# Altium PCB MSXIV_BatteryModuleConnectorBoard_Rev2.PcbDoc
Units mm, origin at the board's own origin, x right, y up, seen from the top; angles counter-clockwise.
Board outline 46.74 x 46.4 mm, 2 copper layers (Top Layer, Bottom Layer); 15 components, 16 nets, 54 pads, 0 vias.
Unrouted connection lines stored in the file: 11.
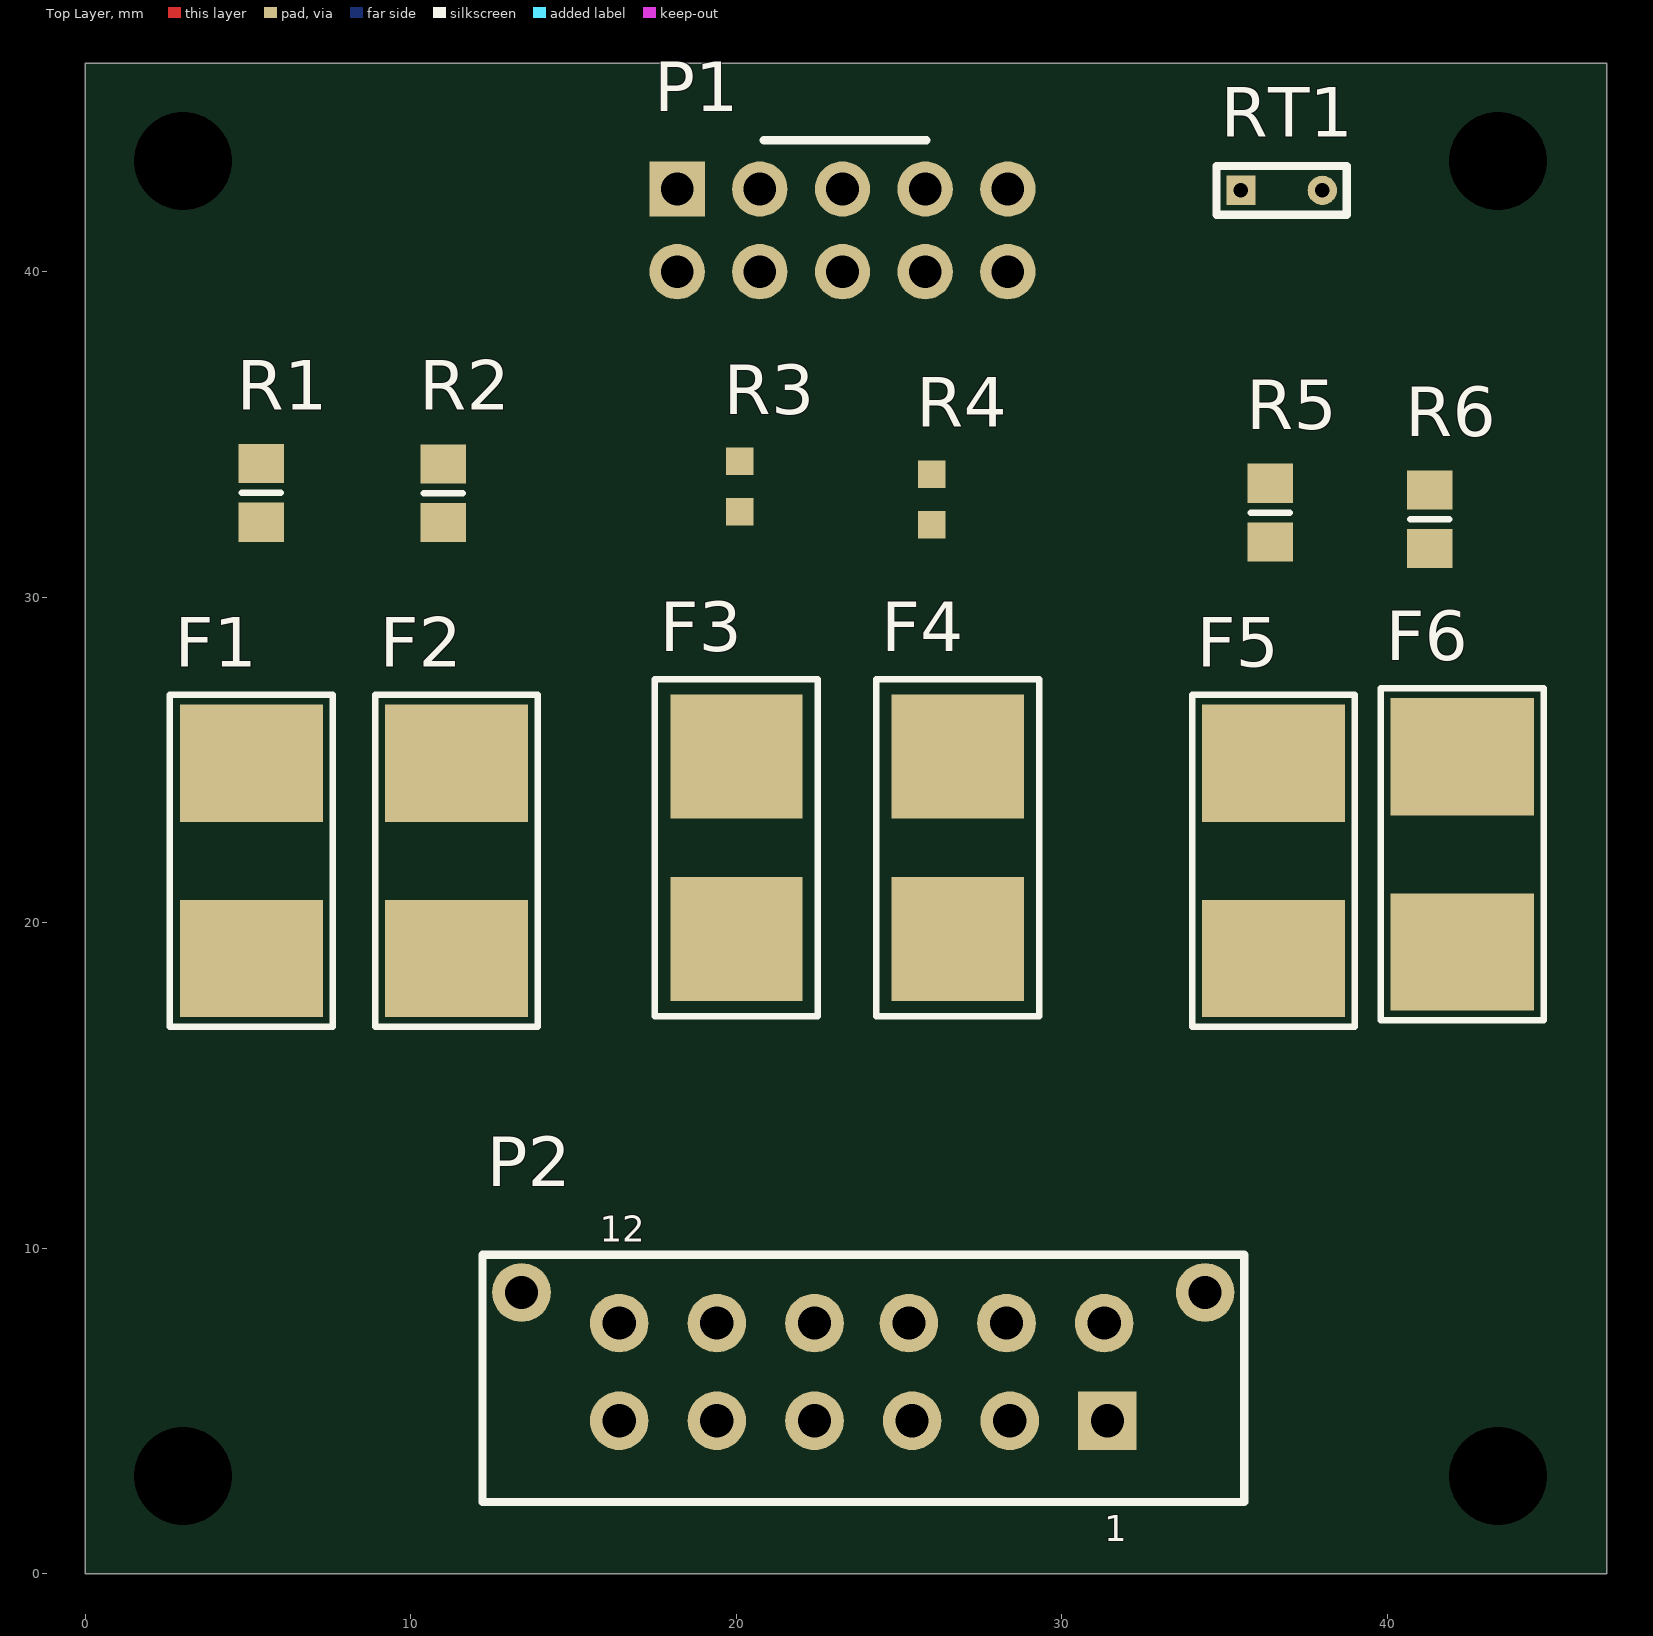
[diagram p0: Top Layer view]
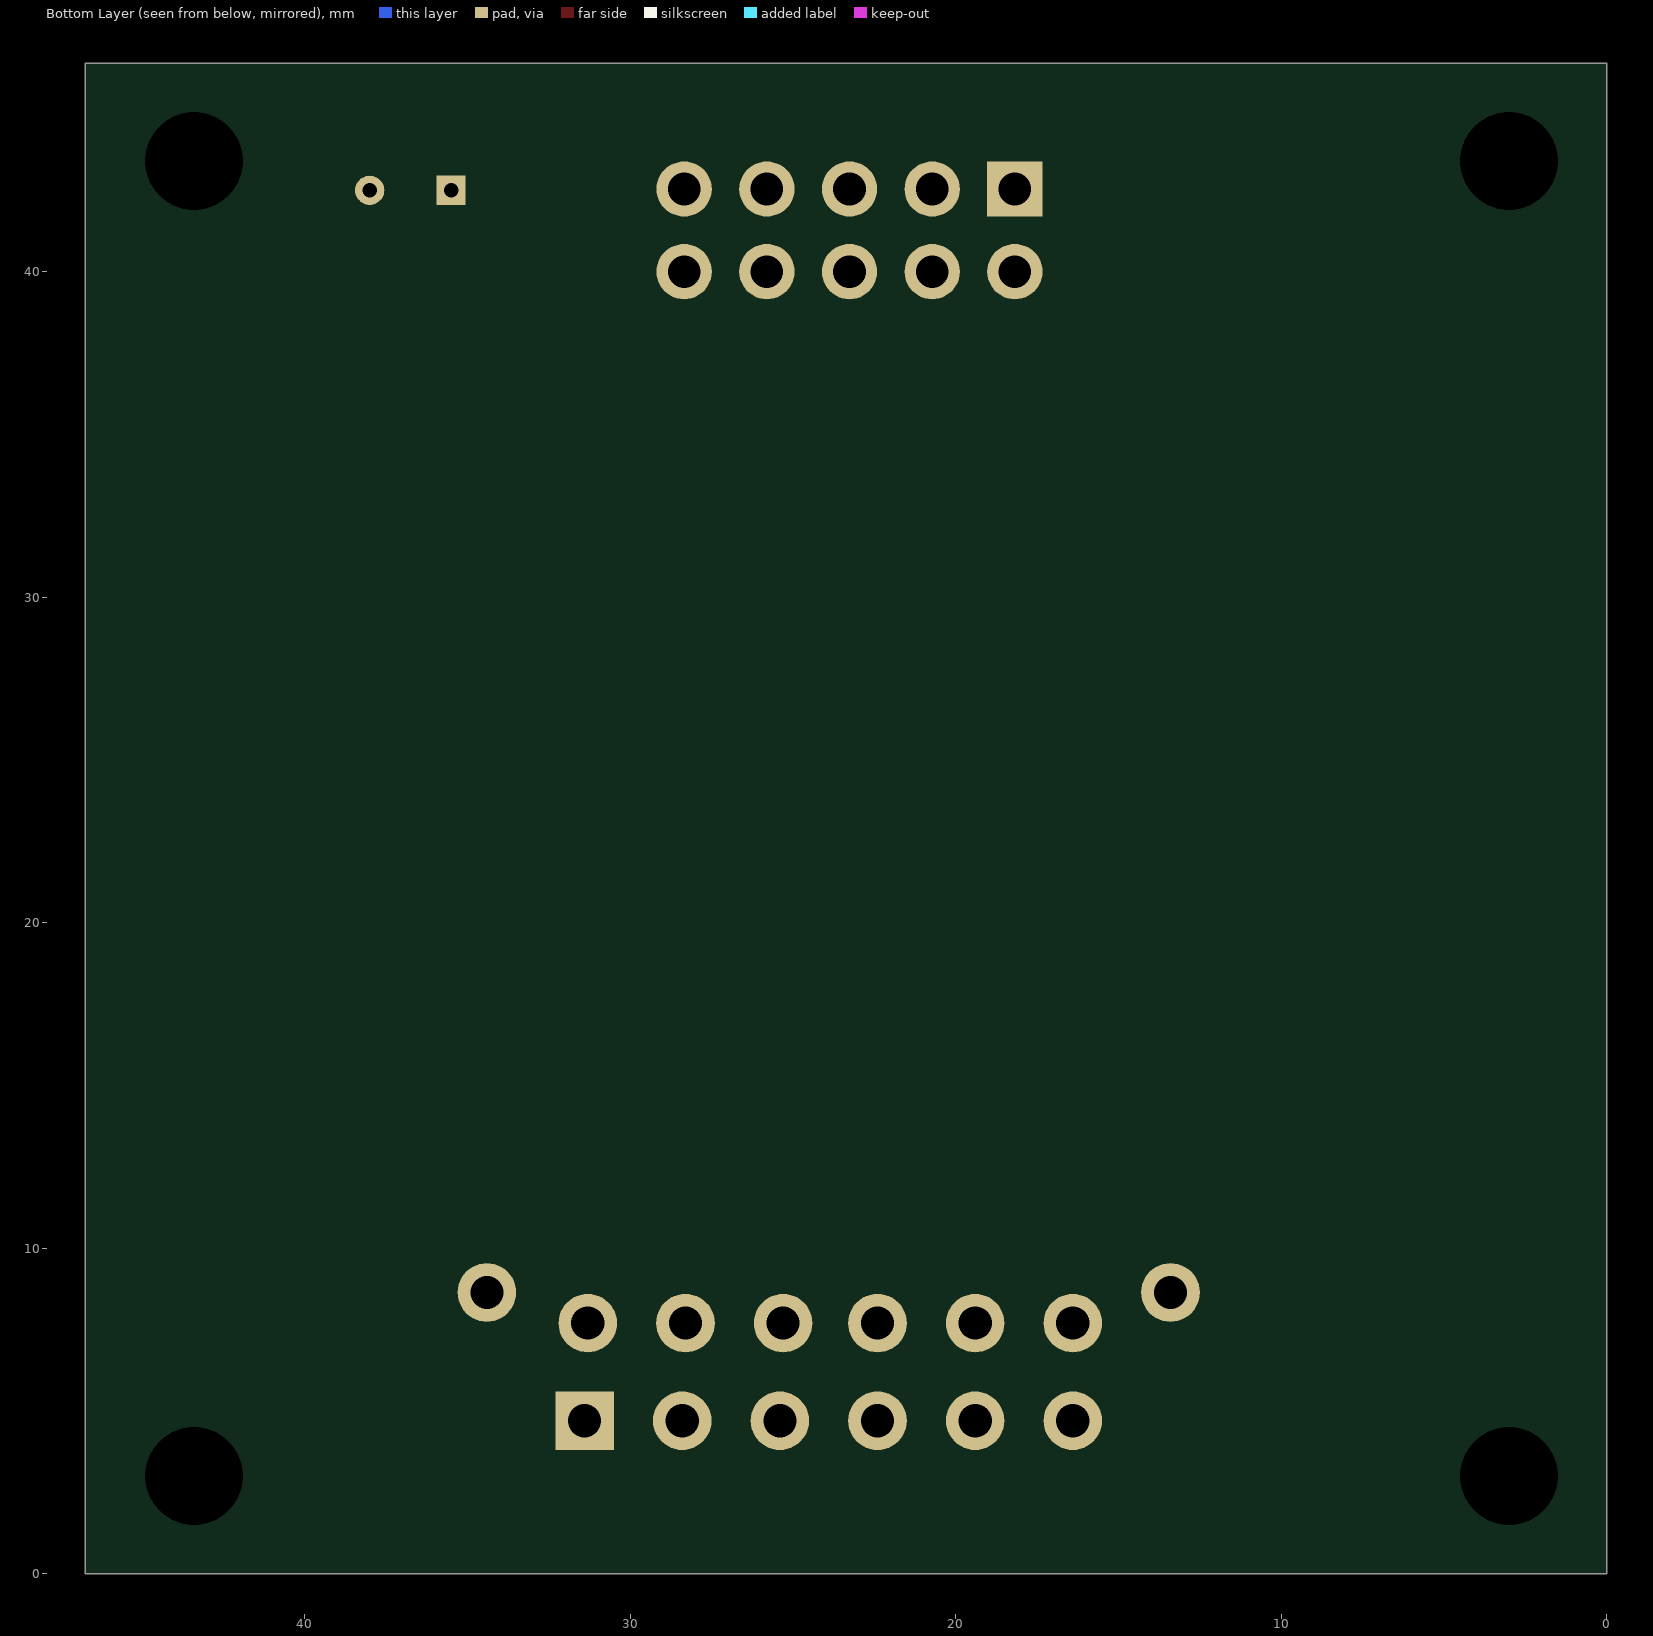
[diagram p1: Bottom Layer view, seen from below]

## Layer stack, top to bottom
Top Solder: solder mask 0.0102, Solder Resist, Dk 3.5
Top Layer: signal copper 0.0356
Dielectric 1: dielectric 0.32, FR-4, Dk 4.8
Bottom Layer: signal copper 0.0356
Bottom Solder: solder mask 0.0102, Solder Resist, Dk 3.5

## Board outline
0,0 46.736,0 46.736,46.4 0,46.4

## Design rules (kind name [scope] priority, off if disabled: settings)
Clearance [All] p1: gap=0.254 ignorepadtopadclearanceinfootprint=FALSE except(0: Arc-Hole Track-Hole SMDPad-Hole THPad-Hole Via-Hole Fill-Hole Poly-Hole Region-Hole Text-Hole)
PolygonConnect [All] p1: connectstyle=Relief reliefconductorwidth=0.254 reliefentries=4 polygonreliefangle="90 Angle" airgapwidth=0.254
RoutingVias [All] p1: holewidth=0.711 width=1.27 viastyle="Through Hole" minholewidth=0.711 minwidth=1.27 maxholewidth=0.711 maxwidth=1.27
SolderMaskExpansion [All] p1: expansion=0.102
Width [All] p1: maxlimit=0.254 minlimit=0.254 preferedwidth=0.254
30 further rules are at their usual default settings.

## Components (designator, comment, footprint, x,y, rotation, side; value= is the part's Value field where it differs from the comment)
F1 "FUSE 250MA 250V" "Fuse IEC 60127-4" 5.1,21.9 r90 top
F2 "FUSE 250MA 250V" "Fuse IEC 60127-4" 11.4,21.9 r90 top
F3 "FUSE 500mA" "Fuse 0678D" 20,22.3 r90 top
F4 "FUSE 500mA" "Fuse 0678D" 26.8,22.3 r90 top
F5 "FUSE 250MA 250V" "Fuse IEC 60127-4" 36.5,21.9 r90 top
F6 "FUSE 250MA 250V" "Fuse IEC 60127-4" 42.3,22.1 r90 top
P1 "CONN 10POS HEADR FMALE 0.1\"" "CONN ,10 POS Header 0.100\"" 28.34,42.54 r180 top
P2 "CONN 12POS MICRO-FIT 3mm" "CONN, 12POS MICRO-FIT 3mm" 31.4,4.7 r0 top
R1 "" 0805 5.4,33.2 r270 top
R2 "" 0805 11,33.2 r90 top
R3 "RES 1 OHM 5% 1/10W 0603" "RES, 0603" 20.1,33.4 r90 top
R4 "RES 1 OHM 5% 1/10W 0603" "RES, 0603" 26,33 r270 top
R5 "" 0805 36.401,32.597 r270 top
R6 "" 0805 41.3,32.4 r90 top
RT1 "10K NTC" "NTC THERMISTOR BEAD" 35.5,42.5 r0 top

## Footprints (in the part's own frame and the unit in brackets; to place one, negate y for a bottom-side part, rotate by r counter-clockwise, add the part's x,y. Pads: shape width x height; smd on the part's side, far side on the other; paste and mask are expansions set on the pad)
0805 [mm]
  rect 1.2x1.4 smd: 1(-0.903,-0.001) 2(0.897,-0.001)
  silkscreen extent 0,-0.6 0,0.6, body extent -1.08,-0.7 1.07,0.7, height 0.7
"CONN ,10 POS Header 0.100\"" [mm]
  rect 1.7x1.7 hole 1: 1(10.16,0)
  round 1.7 hole 1: 2(10.16,2.54) 3(7.62,0) 4(7.62,2.54) 5(5.08,0) 6(5.08,2.54) 7(2.54,0) 8(2.54,2.54) 9(0,0) 10(0,2.54)
  silkscreen extent 2.5,-1.5 7.5,-1.5
"CONN, 12POS MICRO-FIT 3mm" [mm]
  round 1.8 hole 1.02: 0(-18,3.94) 0(3,3.94) 2(-3,0) 3(-6,0) 4(-9,0) 5(-12,0) 6(-15,0) 7(-0.1,3) 8(-3.1,3) 9(-6.1,3) 10(-9,3) 11(-12,3) 12(-15,3)
  rect 1.8x1.8 hole 1.02: 1(0,0)
  silkscreen extent -19.2,-2.5 4.2,5.1, body extent -18.57,-2.5 3.58,6.27, height 9.95
"Fuse 0678D" [mm]
  rect 3.81x4.06 smd: A(-2.8,0) K(2.8,0)
  silkscreen extent -5.18,-2.5 5.18,2.5
"Fuse IEC 60127-4" [mm]
  rect 3.6x4.4 smd: A(-3,0) K(3,0)
  silkscreen extent -5.1,-2.5 5.1,2.5
"NTC THERMISTOR BEAD" [mm] "NTC Thermistor 10k Bead"
  rect 0.9x0.9 hole 0.45: 1(0,0)
  round 0.9 hole 0.45: 2(2.5,0)
  silkscreen extent -0.75,-0.75 3.25,0.75
"RES, 0603" [mm] "Chip Resistor, 2-Leads, Body 1.60x0.80mm, IPC Medium Density"
  rect 0.85x0.85 smd: 1(-0.775,0) 2(0.775,0)
  body extent -0.8,-0.4 0.8,0.4, height 0.55

## Part data
F1 F2 F5 F6: "Surface Mount Fuses OMF 250V 250mA", Supplier Part Number 1=486-3474-1-ND, Supplier 1=Digi-Key
F3 F4: "FUSE SMT 3912 FAST 250V 500MA", Supplier Part Number 1=507-2256-1-ND, Supplier 1=Digi-Key
P1: "10 Position Header Connector 0.100\" (2.54mm) Through Hole, Right Angle Gold", Current Rating=3A, Insulation Color=Black, Manufacturer 1="Sullins Connector Solutions", Manufacturer Part Number 1=SFH11-PBPC-D05-RA-BK, Material Flammability Rating="UL94 V-0", Operating Temperature="-40°C ~ 105°C", Supplier Part Number 1=S9202-ND, Voltage=-, ComponentLink1Description=http://sullinscorp.com/catalogs/147_PAGE119_.100_SFH11_SERIES_FEMALE_HDR_ST_RA.pdf, ComponentLink1URL=http://sullinscorp.com/catalogs/147_PAGE119_.100_SFH11_SERIES_FEMALE_HDR_ST_RA.pdf, Connector Type=Header, Contact Finish - Mating=Gold, Contact Finish - Post=Gold, Contact Finish Thickness - Mating=Flash, Contact Finish Thickness - Post=Flash, Contact Length - Post="0.106\" (2.69mm)", Contact Material=Brass, Contact Shape=Square, Contact Type="Female Socket", Fastening Type=Push-Pull, Ingress Protection=-, Insulation Height="0.236\" (6.00mm)", Insulation Material="Polybutylene Terephthalate (PBT)", Mated Stacking Heights=-, Mounting Type="Through Hole, Right Angle", Number of Positions=10, Number of Positions Loaded=All, Number of Rows=2, Packaging=Tray, Part Status=Active, Pitch - Mating="0.100\" (2.54mm)", Row Spacing - Mating="0.100\" (2.54mm)", Style="Board to Board", Supplier 1=Digi-Key, Termination=Solder
P2: "Connector Header Through Hole 12 position 0.118\" (3.00mm)", Current Rating=-, Insulation Color=Black, Manufacturer="Molex, LLC", Manufacturer Part Number=0430451227, Material Flammability Rating="UL94 V-0", Supplier Part Number 1=WM10697-ND, Applications="General Purpose, Medical, Military, Telecommunications", Category="Connectors, Interconnects", ComponentLink1Description=https://www.molex.com/pdm_docs/sd/430451227_sd.pdf, ComponentLink1URL=https://www.molex.com/pdm_docs/sd/430451227_sd.pdf, Connector Type=Header, Contact Finish - Mating=Tin, Contact Finish - Post=Tin, Contact Finish Thickness - Mating="60.0µin (1.52µm)", Contact Finish Thickness - Post=-, Contact Length - Mating=-, Contact Length - Post="0.125\" (3.18mm)", Contact Material=Brass, Contact Shape=Square, Contact Type="Male Pin", Fastening Type="Locking Ramp", Features="Board Guide", Ingress Protection=-, Insulation Height="0.390\" (9.91mm)", Insulation Material="Liquid Crystal Polymer (LCP), Glass Filled", Mated Stacking Heights=-, Mounting Type="Through Hole", Number of Positions=12, Number of Positions Loaded=All, Number of Rows=2, Operating Temperature=-, Overall Contact Length=-, Packaging=Tray, Part Status=Active, Pitch - Mating="0.118\" (3.00mm)", Pricing 1="1=3.61, 10=3.283, 25=3.0816, 50=2.9478, 100=2.8138, 250=2.5458, 500=2.34482, 1008=2.00985, 3024=1.87586 (CAD)", RoHS="RoHS Compliant", Row Spacing - Mating="0.118\" (3.00mm)", Shrouding="Shrouded - 4 Wall", Stock 1=1709, Style="Board to Cable/Wire", Supplier 1=Digi-Key, Termination=Solder, Voltage Rating=-
R1 R2 R5 R6: library part "RES 2 OHM 1% 1/8W 0805", "2 Ohm ±1% 0.125W Chip Resistor 0805", Package="2012 Rohm Semiconductor", Digi-Key_Part_Number=311-2.00CRCT-ND, Digi-Key_Purchase_URL=https://www.digikey.ca/product-detail/en/yageo/RC0805FR-072RL/311-2.00CRCT-ND/730610?utm_source=snapeda&utm_medium=aggregator&utm_campaign=symbol, MF=Yageo, MP=RC0805FR-072RL, SnapEDA_Link=https://www.snapeda.com/parts/RC0805FR-072RL/Yageo/view-part/?ref=snap, Supplier 1=Digi-Key
R3 R4: "RES SMD 1 OHM 5% 1/10W 0603", Digi-Key Part Number=RHM1.0AZCT-ND, Manufacturer 1="Rohm Semiconductor", Manufacturer Part Number 1=KTR03EZPJ1R0, Package / Case="0603 (1608 Metric)", Power (Watts)="0.1W, 1/10W", Resistance="1 Ohms", Supplier Device Package=0603, Tolerance=±5%, Detailed Description ="1 Ohms ±5% 0.1W, 1/10W Chip Resistor 0603 (1608 Metric) Automotive AEC-Q200, High Voltage Thick Film", Supplier 1=Digi-Key, Supplier Part Number 1=RHM1.0AZCT-ND
RT1: library part "NTC THERMISTOR 10K 1% BEAD", "NTC Thermistor 10k Bead", B Value Tolerance=±1%, Manufacturer="Murata Electronics North America", Manufacturer Part Number=NXRT15XH103FA1B030, Operating Temperature="-40°C ~ 125°C", Package / Case=Bead, Resistance in Ohms @ 25°C=10k, Supplier Part Number 1=490-8601-ND, B0/50=-, B25/50=3380K, B25/75=-, B25/85=3434K, B25/100=3455K, Category="Sensors, Transducers", ComponentLink1Description=https://www.murata.com/~/media/webrenewal/support/library/catalog/products/thermistor/ntc/r44e.ashx, ComponentLink1URL=https://www.murata.com/~/media/webrenewal/support/library/catalog/products/thermistor/ntc/r44e.ashx, Length - Lead Wire=-, Mounting Type="Through Hole", Packaging=Bulk, Part Status=Active, Pricing 1="1=0.96, 5=0.91, 10=0.792, 25=0.696, 50=0.5784, 100=0.4925, 500=0.42834, 1000=0.3748, 5000=0.33197 (CAD)", Resistance Tolerance=±1%, RoHS="RoHS Compliant", Stock 1=25017, Supplier 1=Digi-Key

## Free pads (board coordinates)
  round 2.7 hole 3: ""(3,3) ""(3,43.4) ""(43.4,3) ""(43.4,43.4)

## Nets (pads, with @x,y where several pads share a name; then routed paths per layer and width w, separated by ;. In a path a pad name is that pad's centre, name@x,y a point inside that pad or via, vN(x,y) a via of type N, cw(c..) or ccw(c..) an arc to the next point about the centre after c; other vN are vias at no path point)
"Balance Tap 1": P1.8 R2.2
"Balance Tap 2": P1.10 R4.2
"Balance Tap 3": P1.1 R6.2
GND: P1.9 P2.3 P2.5 RT1.2
NetF1_2: P2.7
NetF2_2: R2.1
NetF3_2: R3.2
NetF4_2: P2.4
NetF5_2: R5.2
NetF6_2: R6.1
"Thermistor 1+": P1.3
"Thermistor 2+": P1.5 P2.10
"Thermistor 3": P1.7 RT1.1
"Voltage Tap 1": P1.2 R1.1
"Voltage Tap 2": P1.4 R3.1
"Voltage Tap 3": P1.6 R5.1
pads on no net: F1.A F1.K F2.A F2.K F3.A F3.K F4.A F4.K F5.A F5.K F6.A F6.K P2.0 P2.1 P2.2 P2.6 P2.8 P2.9 P2.11 P2.12 R1.2 R4.1

## Text inside footprints (layer, text, board x,y; h text height)
P2: Top Overlay "12" at 15.8,10.2 h0.8; Top Overlay "1" at 31.3,1 h0.8